# Altium PCB PCB1.PcbDoc
Units mm, origin at the board's own origin, x right, y up, seen from the top; angles counter-clockwise.
Board outline 85 x 85 mm, 2 copper layers (Top Layer, Bottom Layer); 57 components, 44 nets, 288 pads, 27 vias.
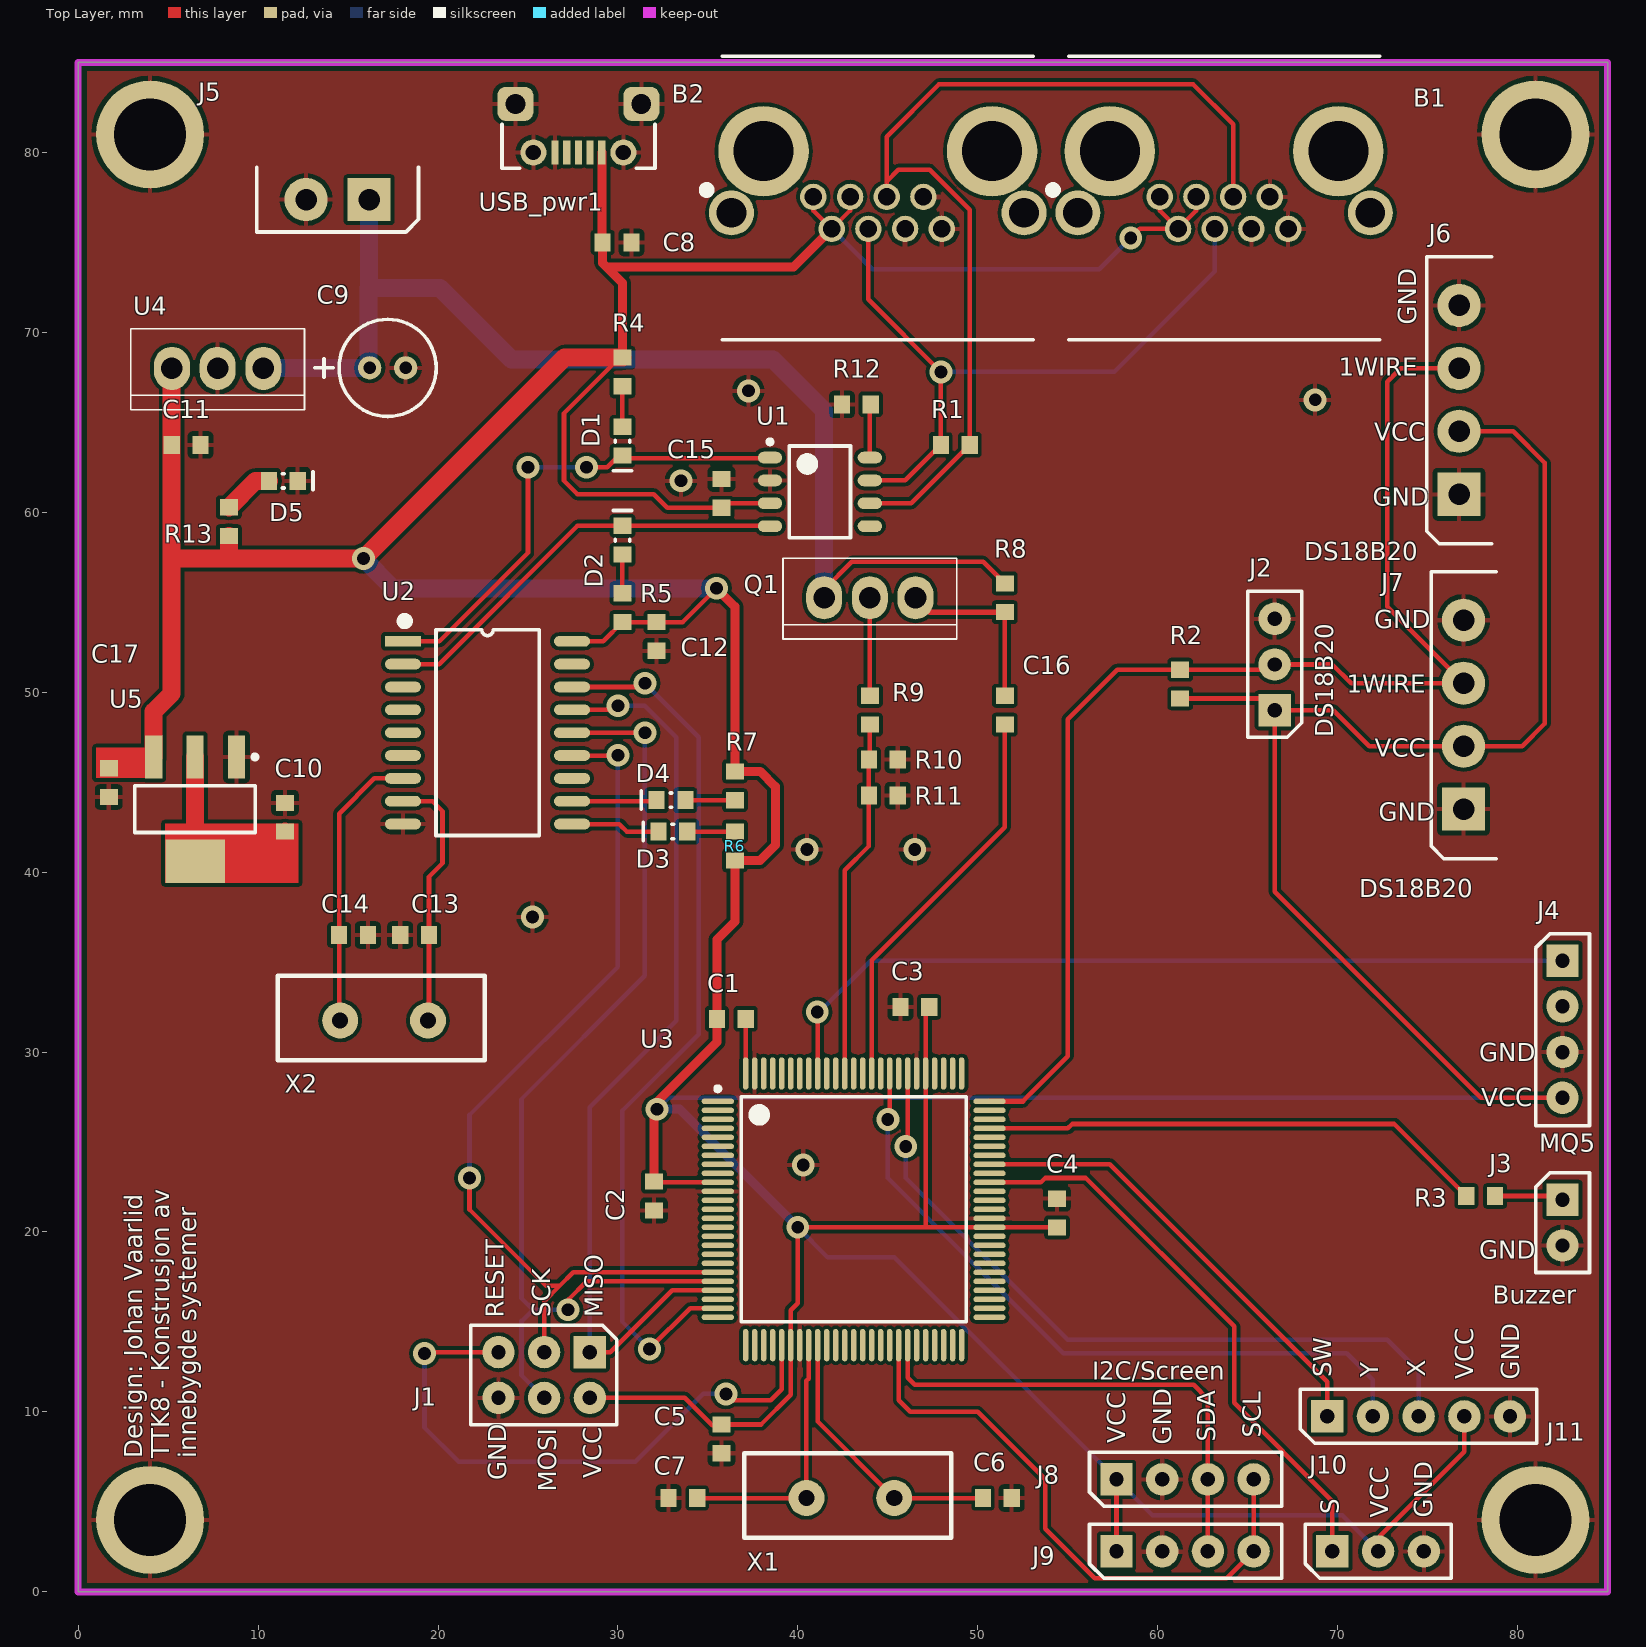
[diagram p0: Top Layer view]
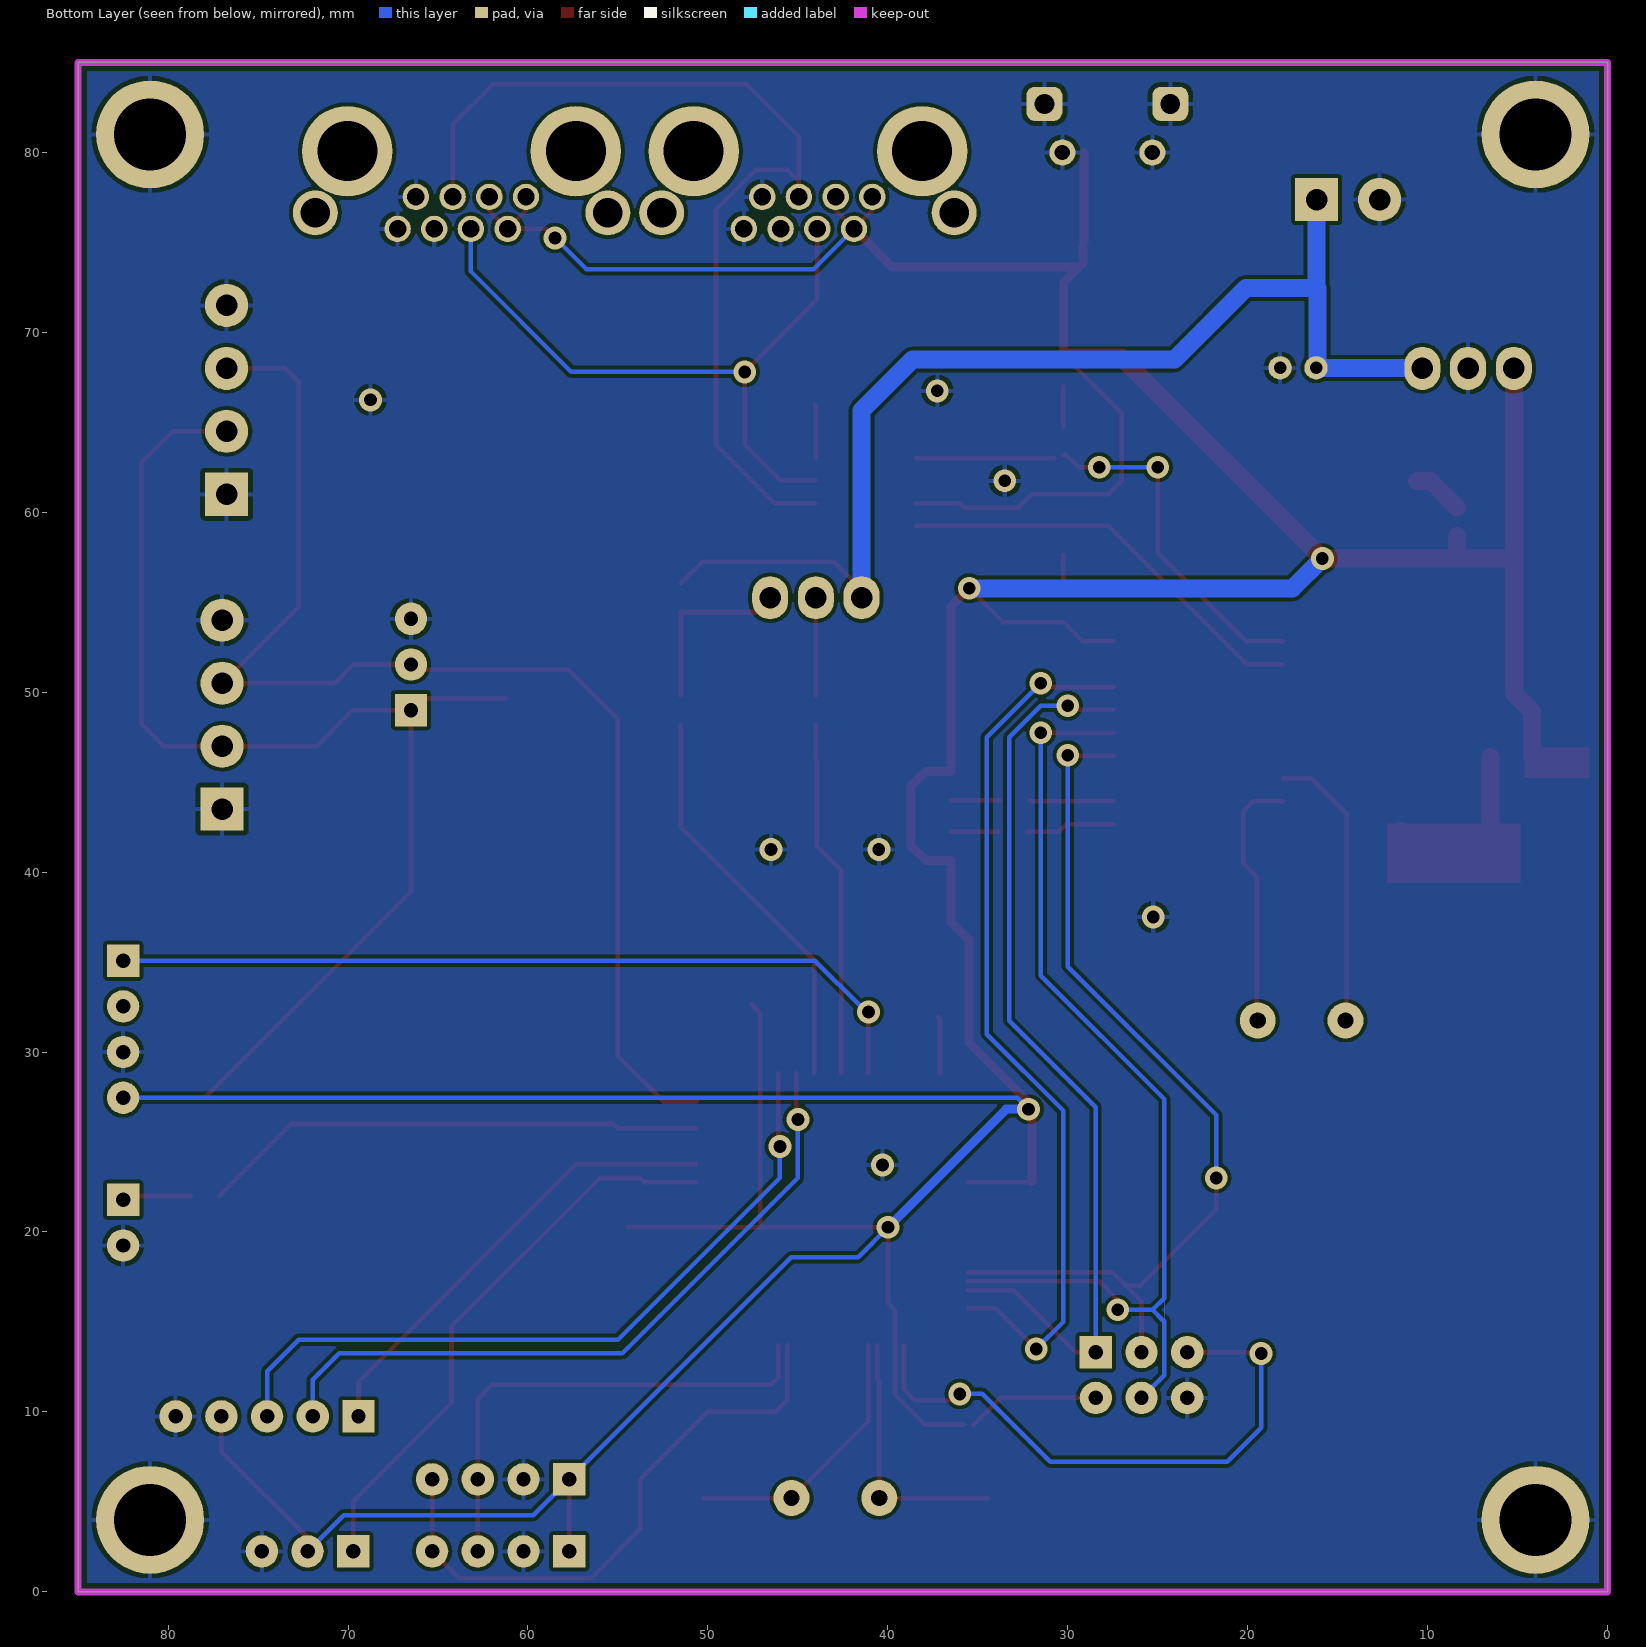
[diagram p1: Bottom Layer view, seen from below]

## Layer stack, top to bottom
Top Solder: solder mask 0.0102, Solder Resist, Dk 3.5
Top Layer: signal copper 0.0356
Dielectric 1: dielectric 0.32, FR-4, Dk 4.8
Bottom Layer: signal copper 0.0356
Bottom Solder: solder mask 0.0102, Solder Resist, Dk 3.5

## Board outline
0,0 0,85 85,85 85,0

## Design rules (kind name [scope] priority, off if disabled: settings)
Clearance [All] p1: gap=0.2 ignorepadtopadclearanceinfootprint=FALSE except(0: Arc-Hole Track-Hole SMDPad-Hole THPad-Hole Via-Hole Fill-Hole Poly-Hole Region-Hole Text-Hole)
PolygonConnect [All] p1: connectstyle=Relief reliefconductorwidth=0.254 reliefentries=4 polygonreliefangle="90 Angle" airgapwidth=0.254
RoutingVias [All] p1: holewidth=0.711 width=1.27 viastyle="Through Hole" minholewidth=0.711 minwidth=1.27 maxholewidth=0.711 maxwidth=1.27
SolderMaskExpansion [All] p1: expansion=0.04
Width [All] p1: maxlimit=2.54 minlimit=0.254 preferedwidth=0.254
30 further rules are at their usual default settings.

## Classes and differential pairs
component class CAN: B1 B2 C12 C13 C14 C15 D1 D2 D3 D4 D? R1 R4 R5 R6 R7 R12 U1 U2 X2 "X2 20mHZ"
component class Sensorkort: C1 C2 C3 C4 C5 C6 C7 C16 J1 J2 J3 J4 J6 J7 J8 J9 J10 J11 J? Q1 R2 R3 R8 R9 R10 R11 U3 X1
component class Voltage_supply: C8 C9 C10 C11 C17 D5 J5 R13 U4 U5 USB_pwr1

## Components (designator, comment, footprint, x,y, rotation, side; value= is the part's Value field where it differs from the comment)
B1 "1-406541-1" 1-406541-1_1 72.325,85.35 r180 top
B2 "1-406541-1" 1-406541-1_1 53.075,85.35 r180 top
C1 "100nF" CAPC0603(1608)55_N 36.3,31.85 r0 top
C2 "100nF" CAPC0603(1608)55_N 32,22 r90 top
C3 "100nF" CAPC0603(1608)55_N 46.5,32.5 r0 top
C4 "100nF" CAPC0603(1608)55_N 54.4,21.05 r270 top
C5 "100nF" CAPC0603(1608)55_N 35.75,8.5 r90 top
C6 "22pF" CAPC0603(1608)55_N 51.082,5.211 r0 top
C7 "22pF" CAPC0603(1608)55_N 33.607,5.211 r0 top
C8 "100nF" CAPC0603(1608)55_N 29.95,75 r180 top
C9 "33uF" CAPPR20D05H11 18.2,68.025 r180 top
C10 "100nF" CAPC0603(1608)55_N 11.5,43.05 r270 top
C11 "100nF" CAPC0603(1608)55_N 6,63.75 r180 top
C12 "100nF" CAPC0603(1608)55_N 32.15,53.1 r90 top
C13 "15pF" CAPC0603(1608)55_N 18.7,36.5 r0 top
C14 "15pF" CAPC0603(1608)55_N 15.3,36.5 r180 top
C15 "100nF" CAPC0603(1608)55_N 35.75,61.05 r90 top
C16 "100nF" CAPC0603(1608)55_N 51.5,49 r270 top
C17 "100nF" CAPC0603(1608)55_N 1.7,44.975 r90 top
D1 "TXCAN" I_LEDC0603(1608)_N 30.25,63.95 r270 top
D2 "RXCAN" I_LEDC0603(1608)_N 30.25,58.45 r90 top
D3 "RX1BF" I_LEDC0603(1608)_N 33.05,42.25 r180 top
D4 "RX0BF" I_LEDC0603(1608)_N 32.95,44 r180 top
D5 "SMD LED Red" I_LEDC0603(1608)_N 11.4,61.75 r0 top
J1 "ISP" HDRV6W64P254_2X3_762X508X900B 25.9,12.05 r270 top
J2 "DS18B20" HDRV3W64P254_1X3_762X254X900B 66.5,51.54 r180 top
J3 "Buzzer" HDRV2W64P254_1X2_508X254X900B 82.5,19.25 r0 top
J4 "MQ5" HDRV4W64P254_1X4_1016X254X900B 82.5,31.27 r0 top
J5 "12V supply" FCI-20020110-C021A01LF 14.417,77.38 r90 top
J6 "DS18B20" CTB932HD_4 76.75,68 r0 top
J7 "DS18B20" CTB932HD_4 77,50.5 r0 top
J8 "I2C/Screen" HDRV4W64P254_1X4_1016X254X900B 61.52,6.25 r90 top
J9 "I2C/Screen" HDRV4W64P254_1X4_1016X254X900B 61.52,2.25 r90 top
J10 "Water sensor" HDRV3W64P254_1X3_762X254X900B 72.25,2.25 r90 top
J11 "Joystick" HDRV5W64P254_1X5_1270X254X900B 74.5,9.75 r90 top
Q1 "IRF9540" TO-220-3P 44,55.25 r0 top
R1 "60R" RESC0603(1608)_N 48.75,63.75 r0 top
R2 "4k7" RESC0603(1608)_N 61.25,50.45 r90 top
R3 "100R" RESC0603(1608)_N 77.95,22 r0 top
R4 "10K" RESC0603(1608)_N 30.25,67.8 r90 top
R5 "10k" RESC0603(1608)_N 30.25,54.7 r270 top
R6 "10k" RESC0603(1608)_N 36.5,41.45 r90 top
R7 "10k" RESC0603(1608)_N 36.5,44.8 r270 top
R8 "10k" RESC0603(1608)_N 51.5,55.25 r90 top
R9 "10k" RESC0603(1608)_N 44,49 r90 top
R10 "10k" RESC0603(1608)_N 44.75,46.25 r180 top
R11 "10k" RESC0603(1608)_N 44.75,44.25 r180 top
R12 "10k" RESC0603(1608)_N 43.25,66 r0 top
R13 "10k" RESC0603(1608)_N 8.375,59.475 r90 top
U1 "MCP2551" SOIC127P590X363-8N 41.225,61.135 r0 top
U2 "MCP2515" SOIC127P940X265-18N 22.75,47.75 r0 top
U3 "ATmega2560-16AU" 100A_N 43.1,21.26 r0 top
U4 "LM78L05" TO-220-3P 7.75,68 r0 top
U5 "TLV1117-33" SOT230P700X180-4N 6.5,43.5 r270 top
USB_pwr1 "USB_CONNECTOR_5P" 105017-0001 27.783,82.175 r180 top
X1 "Krystalloscillator" CrystalTH 42.916,5.211 r180 top
X2 "20Mhz" CrystalTH 17,31.75 r180 top

## Footprints (in the part's own frame and the unit in brackets; to place one, negate y for a bottom-side part, rotate by r counter-clockwise, add the part's x,y. Pads: shape width x height; smd on the part's side, far side on the other; paste and mask are expansions set on the pad)
1-406541-1_1 [mm]
  round 1.47 hole 0.97: 1(12.215,7.82) 2(11.195,9.6) 3(10.175,7.82) 4(9.155,9.6) 5(8.135,7.82) 6(7.115,9.6) 7(6.095,7.82) 8(5.075,9.6)
  round 5.03 hole 3.33: 9(2.285,5.28) 10(14.985,5.28)
  round 2.5 hole 1.65: 11(16.765,8.71) 12(0.505,8.71)
  silkscreen extent 0,0 18.33,15.75, body extent -0.63,-0.66 17.13,15.39, height 14.53
100A_N [mm] "Thin QFP, 100-Leads, Body 14x14mm, Pitch 0.5mm, IPC Medium Density"
  oval 1.8x0.3 smd: 1(-7.55,6) 2(-7.55,5.5) 3(-7.55,5) 4(-7.55,4.5) 5(-7.55,4) 6(-7.55,3.5) 7(-7.55,3) 8(-7.55,2.5) 9(-7.55,2) 10(-7.55,1.5) 11(-7.55,1) 12(-7.55,0.5) 13(-7.55,0) 14(-7.55,-0.5) 15(-7.55,-1) 16(-7.55,-1.5) 17(-7.55,-2) 18(-7.55,-2.5) 19(-7.55,-3) 20(-7.55,-3.5) 21(-7.55,-4) 22(-7.55,-4.5) 23(-7.55,-5) 24(-7.55,-5.5) 25(-7.55,-6) 51(7.55,-6) 52(7.55,-5.5) 53(7.55,-5) 54(7.55,-4.5) 55(7.55,-4) 56(7.55,-3.5) 57(7.55,-3) 58(7.55,-2.5) 59(7.55,-2) 60(7.55,-1.5) 61(7.55,-1) 62(7.55,-0.5) 63(7.55,0) 64(7.55,0.5) 65(7.55,1) 66(7.55,1.5) 67(7.55,2) 68(7.55,2.5) 69(7.55,3) 70(7.55,3.5) 71(7.55,4) 72(7.55,4.5) 73(7.55,5) 74(7.55,5.5) 75(7.55,6)
  oval 0.3x1.8 smd: 26(-6,-7.55) 27(-5.5,-7.55) 28(-5,-7.55) 29(-4.5,-7.55) 30(-4,-7.55) 31(-3.5,-7.55) 32(-3,-7.55) 33(-2.5,-7.55) 34(-2,-7.55) 35(-1.5,-7.55) 36(-1,-7.55) 37(-0.5,-7.55) 38(0,-7.55) 39(0.5,-7.55) 40(1,-7.55) 41(1.5,-7.55) 42(2,-7.55) 43(2.5,-7.55) 44(3,-7.55) 45(3.5,-7.55) 46(4,-7.55) 47(4.5,-7.55) 48(5,-7.55) 49(5.5,-7.55) 50(6,-7.55) 76(6,7.55) 77(5.5,7.55) 78(5,7.55) 79(4.5,7.55) 80(4,7.55) 81(3.5,7.55) 82(3,7.55) 83(2.5,7.55) 84(2,7.55) 85(1.5,7.55) 86(1,7.55) 87(0.5,7.55) 88(0,7.55) 89(-0.5,7.55) 90(-1,7.55) 91(-1.5,7.55) 92(-2,7.55) 93(-2.5,7.55) 94(-3,7.55) 95(-3.5,7.55) 96(-4,7.55) 97(-4.5,7.55) 98(-5,7.55) 99(-5.5,7.55) 100(-6,7.55)
  silkscreen extent -7.67,-6.25 6.25,6.82, body extent -7,-7 7,7, height 1.2
105017-0001 [mm] "Micro USB type B"
  rrect50% 2x1.9 hole 1.1 unplated: 0(-3.517,-0.525) 0(3.483,-0.525)
  round 1.45 hole 0.85 unplated: 0(-2.517,2.175) 0(2.483,2.175)
  rect 0.4x1.35 smd: 1(-1.317,2.175) 2(-0.667,2.175) 3(-0.017,2.175) 4(0.633,2.175) 5(1.283,2.175)
  silkscreen extent -4.28,0.63 4.23,3.05, body extent -4.12,-3.07 4.08,2.33, height 2.73
CAPC0603(1608)55_N [mm] "Chip Capacitor, Body 1.6x0.8mm, Height 0.55mm, IPC Medium Density"
  rect 0.9x1 smd: 1(-0.8,0) 2(0.8,0)
  body extent -0.87,-0.48 0.88,0.47, height 0.55
CAPPR20D05H11 [mm] "D=5mm, Pitch=2.0mm, H=11mm"
  round 1.3 hole 0.7: 1(0,0) 2(2,0)
  silkscreen extent -1.7,-2.7 5.05,2.7, body extent -1.53,-2.53 3.53,2.53, height 11.53
CrystalTH [mm] "CrystalTH"
  round 2 hole 0.9: 1(-2.44,0) 2(2.44,0)
  silkscreen extent -5.6,-2.5 5.9,2.2, body extent -5.47,-2.5 5.87,2.15, height 3.6
CTB932HD_4 [mm] "Pluggbar skruplint 3,5mm pitch, 4way"
  rect 2.4x2.4 hole 1.2 unplated: 1(0,-7)
  round 2.4 hole 1.2 unplated: 2(0,-3.5) 3(0,0) 4(0,3.5)
  silkscreen extent -1.8,-9.75 1.8,6.2, body extent -1.2,-9.4 8,6, height 7
FCI-20020110-C021A01LF [mm] "Pluggbar skruplint 3,5mm pitch"
  rect 2.4x2.4 hole 1.2: 1(0,-1.75)
  round 2.4 hole 1.2: 2(0,1.75)
  silkscreen extent -1.8,-4.5 1.8,4.5, body extent -1.2,-4.2 8,4.2, height 7.3
HDRV2W64P254_1X2_508X254X900B [mm] "Header 1x2"
  rect 1.8x1.8 hole 0.8: 1(0,2.54)
  round 1.8 hole 0.8: 2(0,0)
  silkscreen extent -1.5,-1.5 1.5,4.04
HDRV3W64P254_1X3_762X254X900B [mm] "Header 1x3"
  rect 1.8x1.8 hole 0.8: 1(0,2.54)
  round 1.8 hole 0.8: 2(0,0) 3(0,-2.54)
  silkscreen extent -1.5,-4.07 1.5,4.04
HDRV4W64P254_1X4_1016X254X900B [mm] "Header 1x4"
  rect 1.8x1.8 hole 0.8: 1(0,3.81)
  round 1.8 hole 0.8: 2(0,1.27) 3(0,-1.27) 4(0,-3.81)
  silkscreen extent -1.5,-5.37 1.5,5.31
HDRV5W64P254_1X5_1270X254X900B [mm] "Header 1x5"
  rect 1.8x1.8 hole 0.8: 1(0,5.08)
  round 1.8 hole 0.8: 2(0,2.54) 3(0,0) 4(0,-2.54)
  round 1.8 hole 0.8 unplated: 5(0,-5.08)
  silkscreen extent -1.5,-6.57 1.5,6.58
HDRV6W64P254_2X3_762X508X900B [mm] "Header 2x3"
  rect 1.8x1.8 hole 0.8: 1(-1.27,2.54)
  round 1.8 hole 0.8: 2(1.27,2.54) 3(-1.27,0) 4(1.27,0) 5(-1.27,-2.54) 6(1.27,-2.54)
  silkscreen extent -2.77,-4.07 2.77,4.04, body extent -2.54,-3.81 2.54,3.81, height 8.45
I_LEDC0603(1608)_N [mm] "Chip Resistor, Body 1.6x0.8mm, IPC Medium Density"
  rect 0.9x1 smd: 1(-0.8,0) 2(0.8,0)
  silkscreen extent -0.05,-0.51 1.65,0.51, body extent -0.85,-0.45 0.85,0.45, height 0.9
RESC0603(1608)_N [mm] "Chip Resistor, Body 1.6x0.8mm, IPC Medium Density"
  rect 0.9x1 smd: 1(-0.8,0) 2(0.8,0)
  body extent -0.85,-0.47 0.85,0.47, height 0.6
SOIC127P590X363-8N [mm] "SOIC, 8-Leads, Body 4,88x3,91mm, Pitch 1,27mm, IPC Medium Density"
  oval 1.35x0.65 smd: 1(-2.775,1.905) 2(-2.775,0.635) 3(-2.775,-0.635) 4(-2.775,-1.905) 5(2.775,-1.905) 6(2.775,-0.635) 7(2.775,0.635) 8(2.775,1.905)
  silkscreen extent -2.9,-2.55 1.7,2.9, body extent -3.1,-2.5 3.1,2.5, height 1.75
SOIC127P940X265-18N [mm] "SOIC Wide 1.27mm pitch 9.4mm span 18pin"
  rect 2x0.6 smd: 1(-4.7,5.08)
  oval 2x0.6 smd: 2(-4.7,3.81) 3(-4.7,2.54) 4(-4.7,1.27) 5(-4.7,0) 6(-4.7,-1.27) 7(-4.7,-2.54) 8(-4.7,-3.81) 9(-4.7,-5.08) 10(4.7,-5.08) 11(4.7,-3.81) 12(4.7,-2.54) 13(4.7,-1.27) 14(4.7,0) 15(4.7,1.27) 16(4.7,2.54) 17(4.7,3.81) 18(4.7,5.08)
  silkscreen extent -4.8,-5.71 2.86,6.4, body extent -5.2,-5.76 5.14,5.76, height 2.31
SOT230P700X180-4N [mm] "SOT223, 4-Leads, Body 6,7x7,3mm (max), Pitch 2,30mm, IPC Medium Density"
  rect 2.4x0.95 smd: 1(-2.9,2.3) 2(-2.9,0) 3(-2.9,-2.3)
  rect 2.4x3.3 smd: 4(2.9,0)
  silkscreen extent -3.02,-3.35 1.3,3.45, body extent -3.1,-3.31 3.83,3.19, height 1.59
TO-220-3P [mm]
  oval 2x2.4 hole 1.2: 1(2.54,0) 2(0,0) 3(-2.54,0)
  silkscreen extent -4.83,-2.3 4.83,2.2, body extent -4.83,-2.3 4.83,2.2, height 19.3

## Part data
B1 B2: "ModJack,RightAngle,8Position,Cat5 TE Connectivity Female Cat5 RJ45 Connector, Right Angle, Through Hole Mount,"
C1 C2 C3 C4 C5 C8 C10 C11 C12 C15 C16 C17: library part 3028, "X7R 50V 5%"
C6 C7: library part 3934, "Capacitor"
C9: library part 3290, "50V, Elektrolytt"
C13 C14: library part 3026, "NP0 50V 5%"
D1 D2 D3 D4: library part 2208
D5: library part 2209
J1: library part 3187
J2 J10: library part 2430
J3: library part 2429
J4 J8 J9: library part 2431
J5: library part 2218
J6 J7: library part 2281
J11: library part 2432
Q1: library part 1529, "MOSFET P-Kanal"
R1: library part 3421, "0.1W 1% Thick film resistor"
R2: library part 3457, "0.1W 1% Thick film resistor"
R3: library part 3416, "0.1W 1% Thick film resistor"
R4 R5 R6 R7 R8 R9 R10 R11 R12 R13: library part 2444, "0.1W 1% Thick film resistor"
U1: library part 2049, "CAN TRANCEIVER"
U2: library part 2048, "CAN CONTROLLER"
U3: "8-bit AVR Microcontroller, 4.5-5.5V, 256KB Flash, 4KB EEPROM, 8KB SRAM, 86 GPIO pins, 100-pin TQFP, Industrial Grade (-40°C to 85°C), Pb-Free"
U4: library part 1429, "Voltage Regulator"
U5: library part 2386, "3,3V Low dropout regulator"
USB_pwr1: library part 4034, "Micro USB Type B"
X1: library part 3915, "4MHz"
X2: library part 3915, "20MHz"

## Free pads (board coordinates)
  round 6 hole 4: 1(4,81) 2(4,4) 3(81,4) 4(81,81)

## Via types
v1: diameter 1.27, hole 0.711, Top Layer to Bottom Layer, 27 vias

## Nets (pads, with @x,y where several pads share a name; then routed paths per layer and width w, separated by ;. In a path a pad name is that pad's centre, name@x,y a point inside that pad or via, vN(x,y) a via of type N, cw(c..) or ccw(c..) an arc to the next point about the centre after c; other vN are vias at no path point)
1_WIRE: J2.2 J6.3 J7.3 R2.2 U3.75 | length 70.6
  Top Layer w0.254: 52.49,27.26 55,29.77 55,48.5 57.75,51.25 R2.2 66.21,51.25 J2.2 69.71,51.54 70.75,50.5 J7.3 72.75,54.75 72.75,67.25 73.5,68 J6.3
  Top Layer w0.3: U3.75 52.49,27.26
2: 
3.3V: C10.2 U5.2 U5.4 | length 11.5
  Top Layer w1: U5.2 U5.4 9.85,40.6 C10.2
12V: C9.2 J5.1 Q1.3 R8.2 U4.1 | length 64.9
  Top Layer w0.254: Q1.3 41.46,55.71 43,57.25 50.3,57.25 R8.2
  Bottom Layer w1: U4.1 10.315,68.025 C9.2 ; C9.2@16.123,68.627 16.123,72.475 ; J5.1 16.167,72.519 16.123,72.475 ; Q1.3 41.46,65.665 38.625,68.5 24.075,68.5 20.1,72.475 16.123,72.475
BATTERY_LEVEL: R9.1 R10.2 R11.2 U3.89 | length 20
  Top Layer w0.254: U3.89 42.6,40.1 43.95,41.45 R11.2 R10.2 44,46.3 R9.1
Buzzer: R3.1 U3.72 | length 28.3
  Top Layer w0.254: U3.72 55.01,25.76 55.25,26 73.15,26 R3.1
CANH: B1.4 B2.4 R1.1 U1.7 | length 38.3
  Top Layer w0.254: B2.4 43.92,71.83 v1(47.95,67.8) R1.1 45.97,61.77 U1.7
  Bottom Layer w0.254: v1(47.95,67.8) 57.585,67.8 63.17,73.385 B1.4
CANL: B1.5 B2.5 R1.2 U1.6 | length 54.5
  Top Layer w0.254: U1.6 46.3,60.5 R1.2 49.55,76.808 47.328,79.03 45.583,79.03 44.94,78.387 ; B2.5 44.94,78.387 ; B1.5 64.19,81.556 61.967,83.779 47.837,83.779 44.94,80.882 44.94,78.387
GND: B1.6 B1.7 B1.8 B2.6 B2.7 B2.8 C2.1 C3.1 C4.1 C5.1 C6.2 C7.1 C8.1 C9.1 C10.1 C11.1 C12.1 C13.1 C14.1 C15.2 C17.1 D5.2 J1.6 J2.3 J3.2 J4.3 J5.2 J6.1 J6.4 J7.1 J7.4 J8.2 J9.2 J10.3 J11.5 pad.1 pad.2 pad.3 pad.4 R10.1 R11.1 R12.1 U1.2 U2.9 U3.11 U3.32 U3.62 U3.81 U3.99 U4.2 U5.1 USB_pwr1.0 USB_pwr1.5
  other v1: 40.3,23.725 25.25,37.5 40.5,41.25 46.5,41.25 33.5,61.75 68.75,66.25 37.25,66.75
JOY_SW: J11.1 U3.68 | length 25.7
  Top Layer w0.254: U3.68 57.34,23.76 69.42,11.68 J11.1
JOY_X: J11.3 U3.82 | length 41.3
  Top Layer w0.254: v1(46,24.75) 46.1,24.85 U3.82
  Bottom Layer w0.254: v1(46,24.75) 46,23 55,14 72.75,14 74.5,12.25 J11.3
JOY_Y: J11.2 U3.84 | length 39.6
  Top Layer w0.254: v1(45,26.25) 45.1,26.35 U3.84 ; J11.2 J11.2@72,9.79
  Bottom Layer w0.254: v1(45,26.25) 45,23 54.75,13.25 70.5,13.25 71.96,11.79 J11.2
MCU_RXD: U3.12
MCU_TXD: U3.13
MEASURE_BATTERY: C16.2 U3.86 | length 22.5
  Top Layer w0.254: U3.86 44.1,35.1 51.5,42.5 C16.2
MISO: J1.1 U2.15 U3.22 | length 51.3
  Top Layer w0.254: U2.15 29.77,49.02 v1(30,49.25) ; J1.1 29.57,13.32 33.01,16.76 U3.22
  Bottom Layer w0.254: J1.1 28.44,26.94 33.25,31.75 33.25,47.5 31.5,49.25 v1(30,49.25)
MOSI: J1.4 U2.14 U3.21 | length 55.6
  Top Layer w0.254: v1@27.25,16.25 28.26,17.26 U3.21 ; U2.14 v1(31.5,47.75)
  Bottom Layer w0.254: J1.4 24.638,12.042 24.638,15.075 24.69,15.075 25.289,15.674 ; v1(27.221,15.674) 25.289,15.674 ; v1(31.5,47.75) 31.5,34.25 24.638,27.388 24.638,16.325 25.289,15.674
MQ5: J4.1 U3.92 | length 45.6
  Top Layer w0.254: v1(41.075,32.225) 41.1,32.2 U3.92
  Bottom Layer w0.254: v1@41.4,32.425 44.055,35.08 J4.1
nCS_CAN: U2.16 U3.24 | length 49.5
  Top Layer w0.254: U2.16 31.29,50.29 v1(31.5,50.5) ; v1(31.75,13.5) 34.01,15.76 U3.24
  Bottom Layer w0.254: v1(31.5,50.5) 34.5,47.5 34.5,31 30.25,26.75 30.25,15 v1(31.75,13.5)
NetC1_2: C1.2 U3.100 | length 3.2
  Top Layer w0.254: U3.100 C1.2 C1.2@37.2,31.95
NetC13_2: C13.2 U2.8 X2.1 | length 14.4
  Top Layer w0.254: U2.8 19.695,43.94 20.25,43.385 20.25,40.5 19.5,39.75 C13.2 19.5,31.81 X2.1
NetC14_2: C14.2 U2.7 X2.2 | length 15.9
  Top Layer w0.254: X2.2 14.5,31.81 C14.2 14.5,43.25 16.46,45.21 U2.7
NetC16_1: C16.1 Q1.1 R8.1 | length 9.9
  Top Layer w0.254: C16.1 R8.1
  Top Layer w0.3: Q1.1 47.34,54.45 R8.1
NetD1_1: D1.1 R4.1 | length 2.3
  Top Layer w0.254: D1.1 R4.1
NetD2_1: D2.1 R5.1 | length 2.2
  Top Layer w0.254: R5.1 D2.1
NetD3_1: D3.1 R6.2 | length 2.7
  Top Layer w0.254: D3.1 R6.2
NetD3_2: D3.2 U2.10 | length 5
  Top Layer w0.254: U2.10 30.08,42.67 30.5,42.25 D3.2
NetD4_1: D4.1 R7.2 | length 2.7
  Top Layer w0.254: D4.1 R7.2
NetD5_1: D5.1 R13.2 | length 2.8
  Top Layer w1: R13.2 9.85,61.75 D5.1
NetJ3_1: J3.1 R3.2 | length 3.8
  Top Layer w0.254: R3.2 82.29,22 J3.1
NetQ1_2: Q1.2 R9.2 | length 5.4
  Top Layer w0.254: R9.2 Q1.2
NetR12_2: R12.2 U1.8 | length 3
  Top Layer w0.254: U1.8 44,65.95 R12.2
nRESET: J1.5 U3.30 | length 33.3
  Top Layer w0.254: v1(19.25,13.25) 19.32,13.32 J1.5 ; v1(36,11) 36.35,10.65 38.5,10.65 39.1,11.25 U3.30
  Bottom Layer w0.254: v1(19.25,13.25) 19.25,9.113 21.142,7.221 30.971,7.221 34.75,11 v1(36,11)
RX0BF: D4.2 U2.11 | length 4.7
  Top Layer w0.254: U2.11 32.09,43.94 D4.2
RXCAN: D2.2 U1.4 U2.2 | length 23.6
  Top Layer w0.254: U2.2 20.06,51.56 27.75,59.25 D2.2 38.43,59.25 U1.4
SCK: J1.3 U2.13 U3.20 | length 51.1
  Top Layer w0.254: v1(21.75,23) 21.75,21.25 26,17 26.75,17 ; J1.3 25.9,16.15 26.75,17 ; U2.13 29.98,46.48 v1(30,46.5) ; U3.20 27.51,17.76 26.75,17
  Bottom Layer w0.254: v1(21.75,23) 21.75,26.5 30,34.75 v1(30,46.5)
SCL: J8.4 J9.4 U3.43 | length 33.1
  Top Layer w0.254: U3.43 45.6,10.65 46.25,10 50,10 53.75,6.25 53.75,3.5 56.5,0.75 63.83,0.75 J9.4 J8.4
SDA: J8.3 J9.3 U3.44 | length 27.5
  Top Layer w0.254: U3.44 46.1,11.9 46.5,11.5 62,11.5 62.79,10.71 J8.3 J9.3
TXCAN: D1.2 U1.1 U2.1 | length 27.1
  Top Layer w0.254: U2.1 20.08,52.83 25,57.75 v1(25,62.5) ; v1(28.25,62.5) 29.4,62.5 30.15,63.25 D1.2 ; D1.2@30.75,63 38.41,63 U1.1
  Bottom Layer w0.254: v1(25,62.5) v1(28.25,62.5)
VCC: B1.1 B1.2 B1.3 B2.1 B2.2 B2.3 C1.1 C2.2 C3.2 C4.2 C5.2 C8.2 C11.2 C12.2 C15.1 C17.2 J1.2 J2.1 J4.4 J6.2 J7.2 J8.1 J9.1 J10.2 J11.4 R2.1 R4.2 R5.2 R6.1 R7.1 R13.1 U1.3 U2.18 U3.10 U3.31 U3.61 U3.80 U4.3 U5.3 USB_pwr1.1 | length 435.6
  Top Layer w0.254: U2.18 29.18,52.83 R5.2 C12.2 33.6,53.9 v1(35.475,55.775) ; J1.2 33.72,10.78 C5.2@35.25,9.25 ; C8.2@29.1,75.05 C8.2 C8.2@29.15,74.75 ; R4.2@30.1,68.6 27,65.5 27,61.75 27.75,61 32,61 32.75,60.25 C15.1 36,60.5 U1.3 ; C2.2 32.04,22.76 U3.10 ; C5.2 37.95,9.3 39.6,10.95 U3.31 39.6,15.65 39.99,16.04 v1(39.99,20.26) 47.1,20.26 ; B2.1 40.86,76.77 B2.2 42.9,76.77 B2.3 ; C3.2@47.6,32.65 47.1,32.15 U3.80 47.1,20.26 ; C4.2 54.39,20.26 U3.61 47.1,20.26 ; J9.1 J8.1 ; v1(58.5,75.25) 59,75.75 B1.2 ; B1.1 60.11,76.77 B1.2 ; R2.1 65.85,49.65 J2.1 ; B1.3 62.15,76.77 B1.2 ; J10.2 72.25,3 77.04,7.79 J11.4 ; J6.2 79.75,64.5 81.5,62.75 81.5,48.25 80.25,47 J7.2 71.75,47 69.75,49 J2.1 ; J4.4 77.96,27.46 66.5,38.92 J2.1
  Top Layer w0.5: C8.2@29.1,75.05 USB_pwr1.1 ; C8.2@29.15,74.75 29.15,73.85 29.38,73.62 ; R4.2 30.25,72.75 29.38,73.62 ; C2.2 v1@32,26.825 ; v1@32,27.05 35.5,30.55 C1.1 35.5,36.25 36.5,37.25 R6.1 37.9,40.65 38.75,41.5 38.75,44.75 37.9,45.6 R7.1 36.5,54.75 v1(35.475,55.775) ; B2.2 39.75,73.62 29.38,73.62
  Top Layer w1: U5.3 4.2,48.925 5.2,49.925 5.2,57.475 ; U4.3 5.2,67.99 C11.2 5.2,57.475 ; R13.1 8.375,57.425 ; R4.2 30.1,68.6 27.025,68.6 v1(15.85,57.425) 8.375,57.425 ; 5.2,57.475 5.25,57.425 8.375,57.425
  Bottom Layer w0.254: v1(32.175,26.825) 32.81,27.46 J4.4 ; v1(39.99,20.26) 41.65,18.6 45.36,18.6 J8.1 59.71,4.25 70.25,4.25 J10.2 ; B2.2 44.13,73.5 56.75,73.5 v1(58.5,75.25)
  Bottom Layer w0.5: v1(32.175,26.825) 33.425,26.825 v1(39.99,20.26)
  Bottom Layer w1: v1(15.85,57.425) 17.5,55.775 v1(35.475,55.775)
VREF: U1.5
WATER: J10.1 U3.66 | length 31.9
  Top Layer w0.254: U3.66 53.51,22.76 53.75,23 56,23 64.25,14.75 64.25,10.5 69.71,5.04 J10.1
XTAL1: C6.1 U3.34 X1.1 | length 15.2
  Top Layer w0.254: U3.34 41.1,9.467 X1.1 C6.1
XTAL2: C7.2 U3.33 X1.2 | length 14.6
  Top Layer w0.254: C7.2 X1.2 40.476,11.726 40.6,11.85 U3.33
pads on no net: B1.9 B1.10 B1.11 B1.12 B2.9 B2.10 B2.11 B2.12 J4.2 U2.3 U2.4 U2.5 U2.6 U2.12 U2.17 U3.1 U3.2 U3.3 U3.4 U3.5 U3.6 U3.7 U3.8 U3.9 U3.14 U3.15 U3.16 U3.17 U3.18 U3.19 U3.23 U3.25 U3.26 U3.27 U3.28 U3.29 U3.35 U3.36 U3.37 U3.38 U3.39 U3.40 U3.41 U3.42 U3.45 U3.46 U3.47 U3.48 U3.49 U3.50 U3.51 U3.52 U3.53 U3.54 U3.55 U3.56 U3.57 U3.58 U3.59 U3.60 U3.63 U3.64 U3.65 U3.67 U3.69 U3.70 U3.71 U3.73 U3.74 U3.76 U3.77 U3.78 U3.79 U3.83 U3.85 U3.87 U3.88 U3.90 U3.91 U3.93 U3.94 U3.95 U3.96 U3.97 U3.98 USB_pwr1.2 USB_pwr1.3 USB_pwr1.4
copper on no net: | length 0.4
  Bottom Layer w0.254: 82.21,32.25 82.5,32.54

## Polygon pours and split planes (outlines as drawn)
GND on Bottom Layer "GND_Bottom" (solid, pour order 10): 0.5,0.5 0.5,84.5 84.5,84.5 84.5,0.5
MOSI on Bottom Layer "MOSI" (solid, pour order 6): 24.638,16.325 24.638,15.127 24.69,15.075 25.289,15.674
GND on Top Layer "Top Layer-GND" (solid, pour order 2): 0.5,0.5 0.5,84.5 84.5,84.5 84.5,0.5

## Keep-outs
Keep-Out Layer:
  the board outline again, w0.381

## Other copper
Top Layer:
  rectangle net VCC: 1,45.225 4.625,46.925
  rectangle net 3.3V: 4.825,39.4 12.25,42.7

## Silkscreen, mask and mechanical layers (free items; w line width, h text height)
Top Overlay:
  text "GND" at 74.375,70.425 h1 r90
  text "1WIRE" at 70.05,67.575 h1
  text "VCC" at 72.025,63.975 h1
  text "GND" at 71.95,60.375 h1
  text "DS18B20" at 68.15,57.325 h1
  text "GND" at 72.025,53.55 h1
  text "1WIRE" at 70.5,49.975 h1
  text "DS18B20" at 69.75,47.5 h1 r90
  text "VCC" at 72.075,46.4 h1
  text "GND" at 72.275,42.85 h1
  text "DS18B20" at 71.2,38.6 h1
  text "GND" at 77.875,29.5 h1
  text "VCC" at 77.975,27 h1
  text "MQ5" at 81.2,24.45 h1
  text "GND" at 77.875,18.5 h1
  text "Buzzer" at 78.625,16 h1
  text "SCK" at 26.233,15.253 h1 r90
  text "MISO" at 29.15,15.25 h1 r90
  text "RESET" at 23.65,15.225 h1 r90
  text "X" at 74.875,11.95 h1 r90
  text "SW" at 69.656,11.916 h1 r90
  text "Y" at 72.268,11.918 h1 r90
  text "VCC" at 77.525,11.825 h1 r90
  text "I2C/Screen" at 56.375,11.8 h1
  text "GND" at 80.1,11.775 h1 r90
  text "SCL" at 65.725,8.55 h1 r90
  text "SDA" at 63.2,8.35 h1 r90
  text "VCC" at 58.2,8.25 h1 r90
  text "GND" at 60.75,8.175 h1 r90
  text "Design: Johan Vaarlid / TTK8 - Konstrusjon av  / innebygde systemer" at 6.575,7.425 h1 r90
  text "VCC" at 29.075,6.3 h1 r90
  text "GND" at 23.8,6.2 h1 r90
  text "MOSI" at 26.575,5.575 h1 r90
  text "S" at 70.05,4.3 h1 r90
  text "VCC" at 72.8,4.125 h1 r90
  text "GND" at 75.25,4.125 h1 r90
Top Solder:
  rectangle: 36.891,27.87 49.291,29.762
  rectangle: 49.708,15.043 51.62,27.453
  rectangle: 36.871,12.754 49.291,14.646
  rectangle: 34.602,15.063 36.515,27.463